# Altium PCB 2020-08-15_10-10-41.PcbDoc
Units mil, origin at the board's own origin, x right, y up, seen from the top; angles counter-clockwise.
Board outline 1600 x 2200 mil, 4 copper layers (Top Layer, MidLayer1, MidLayer2, Bottom Layer); 13 components, 6 nets, 27 pads, 47 vias.
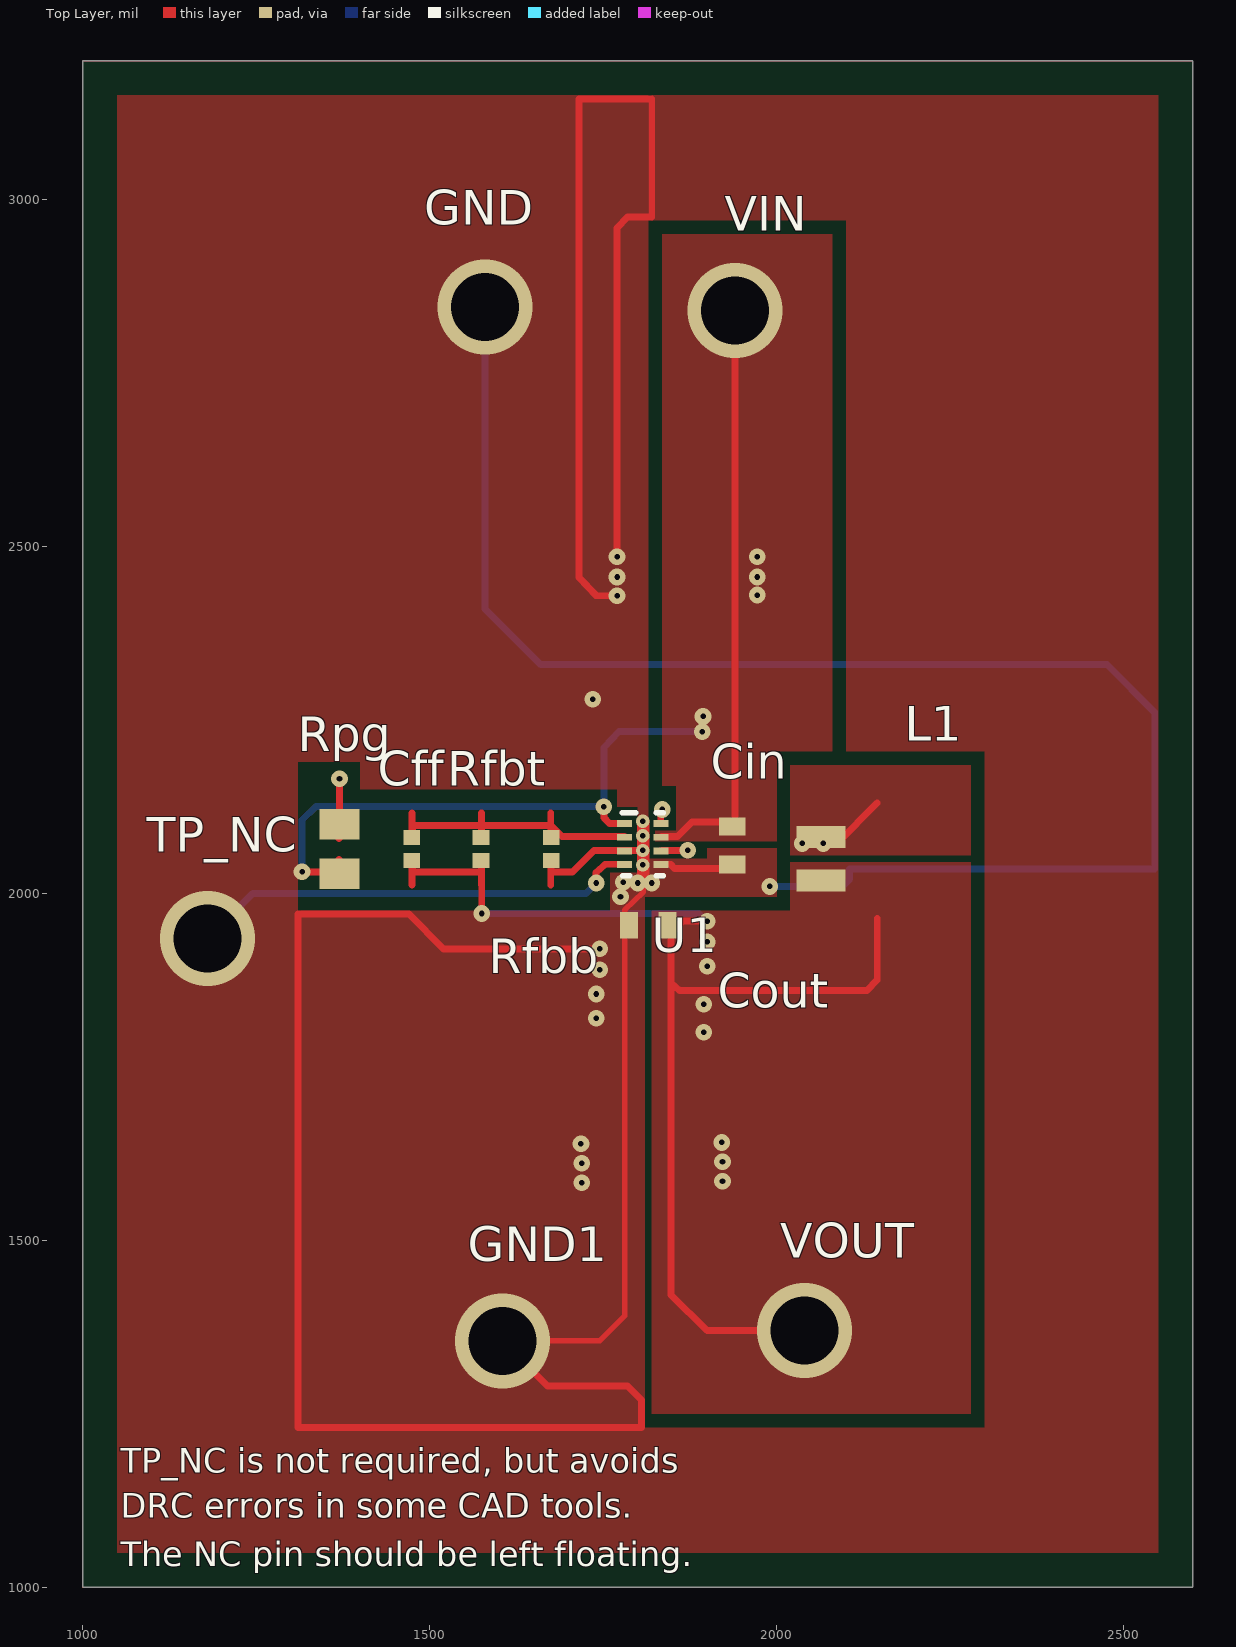
[diagram p0: Top Layer view]
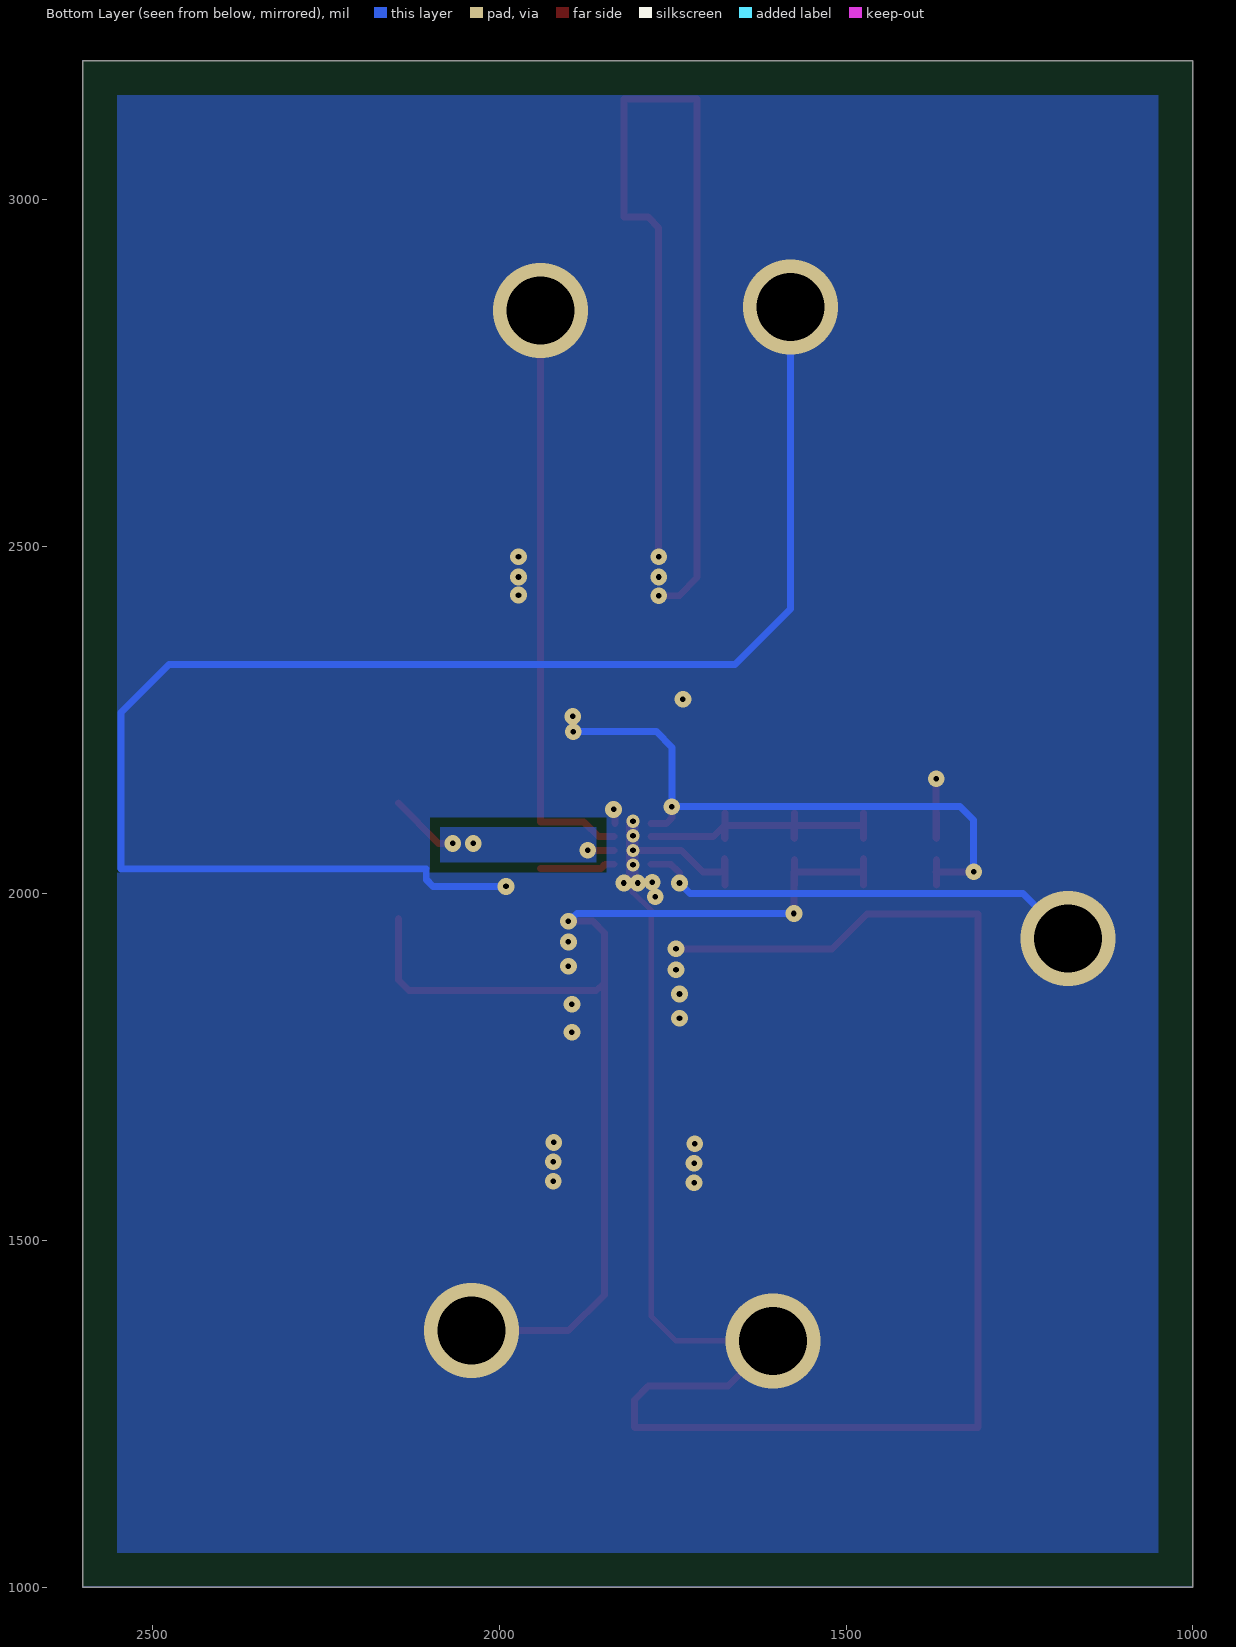
[diagram p1: Bottom Layer view, seen from below]
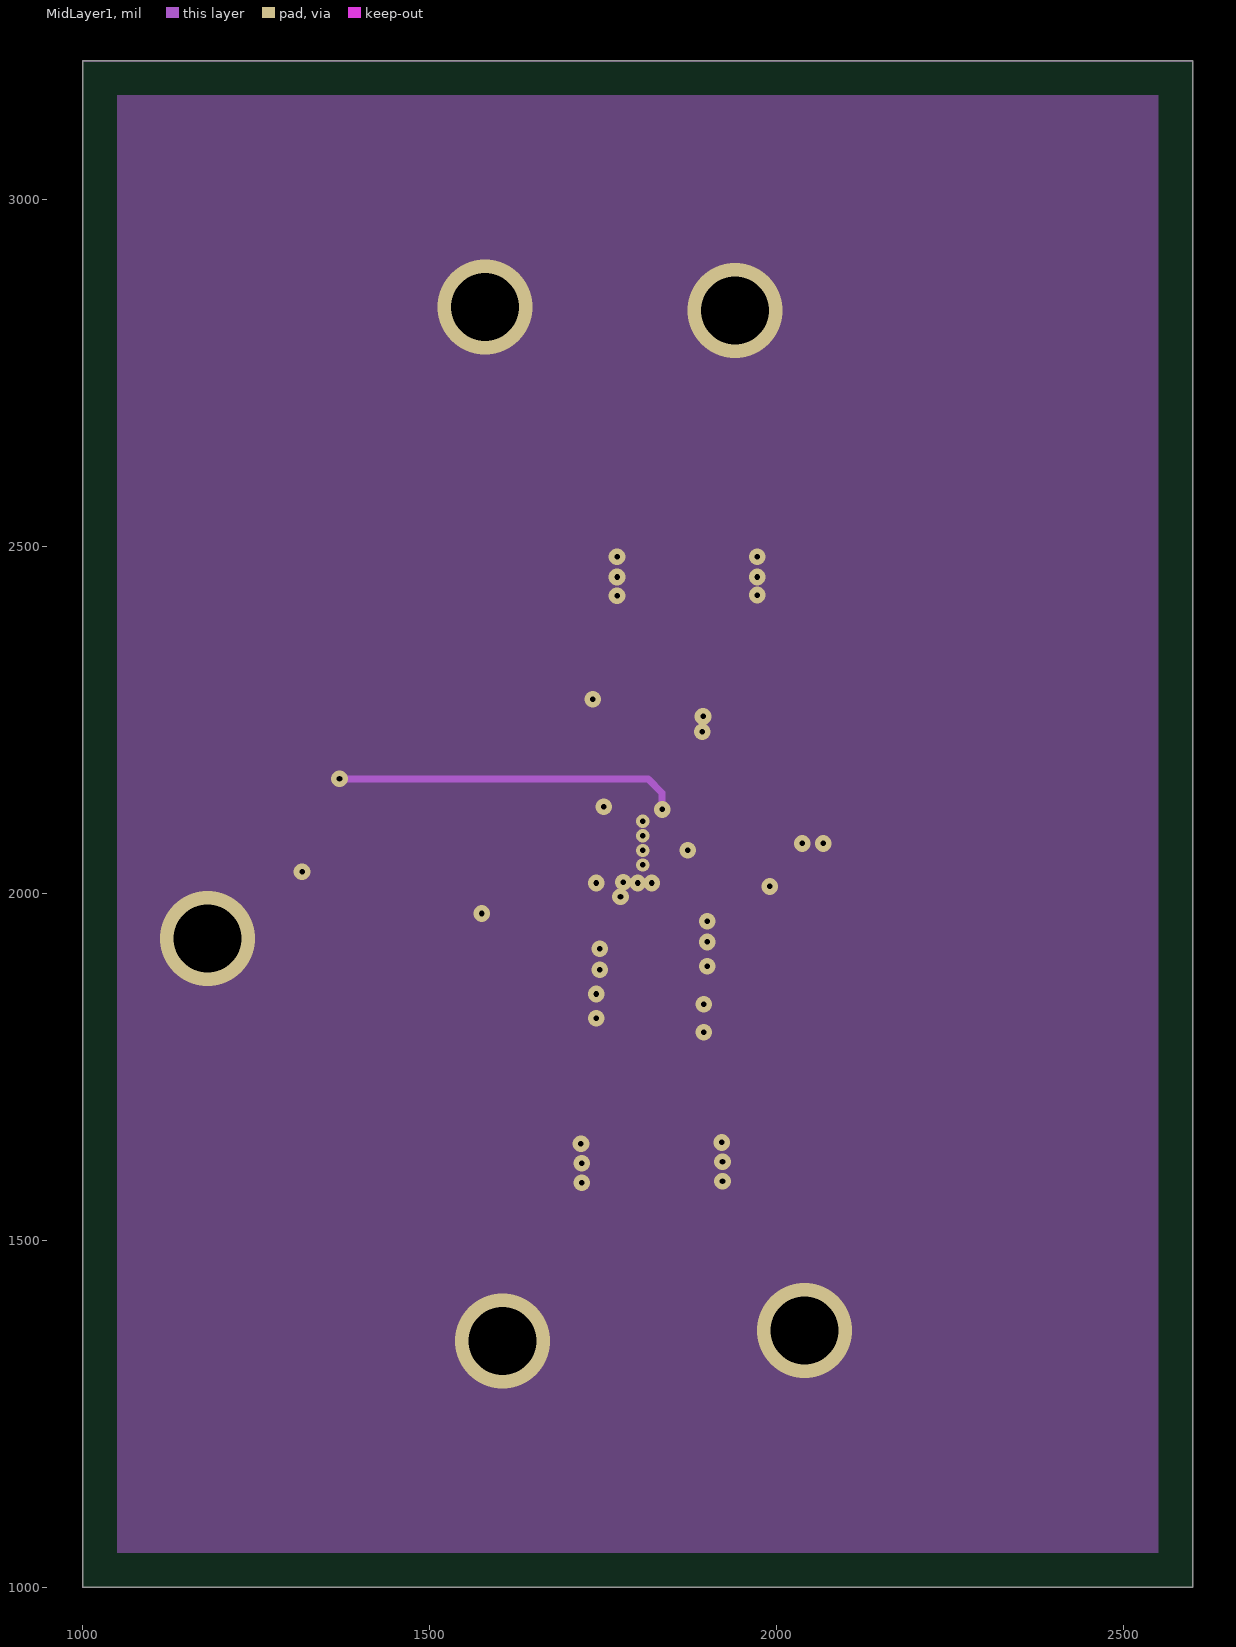
[diagram p2: MidLayer1]
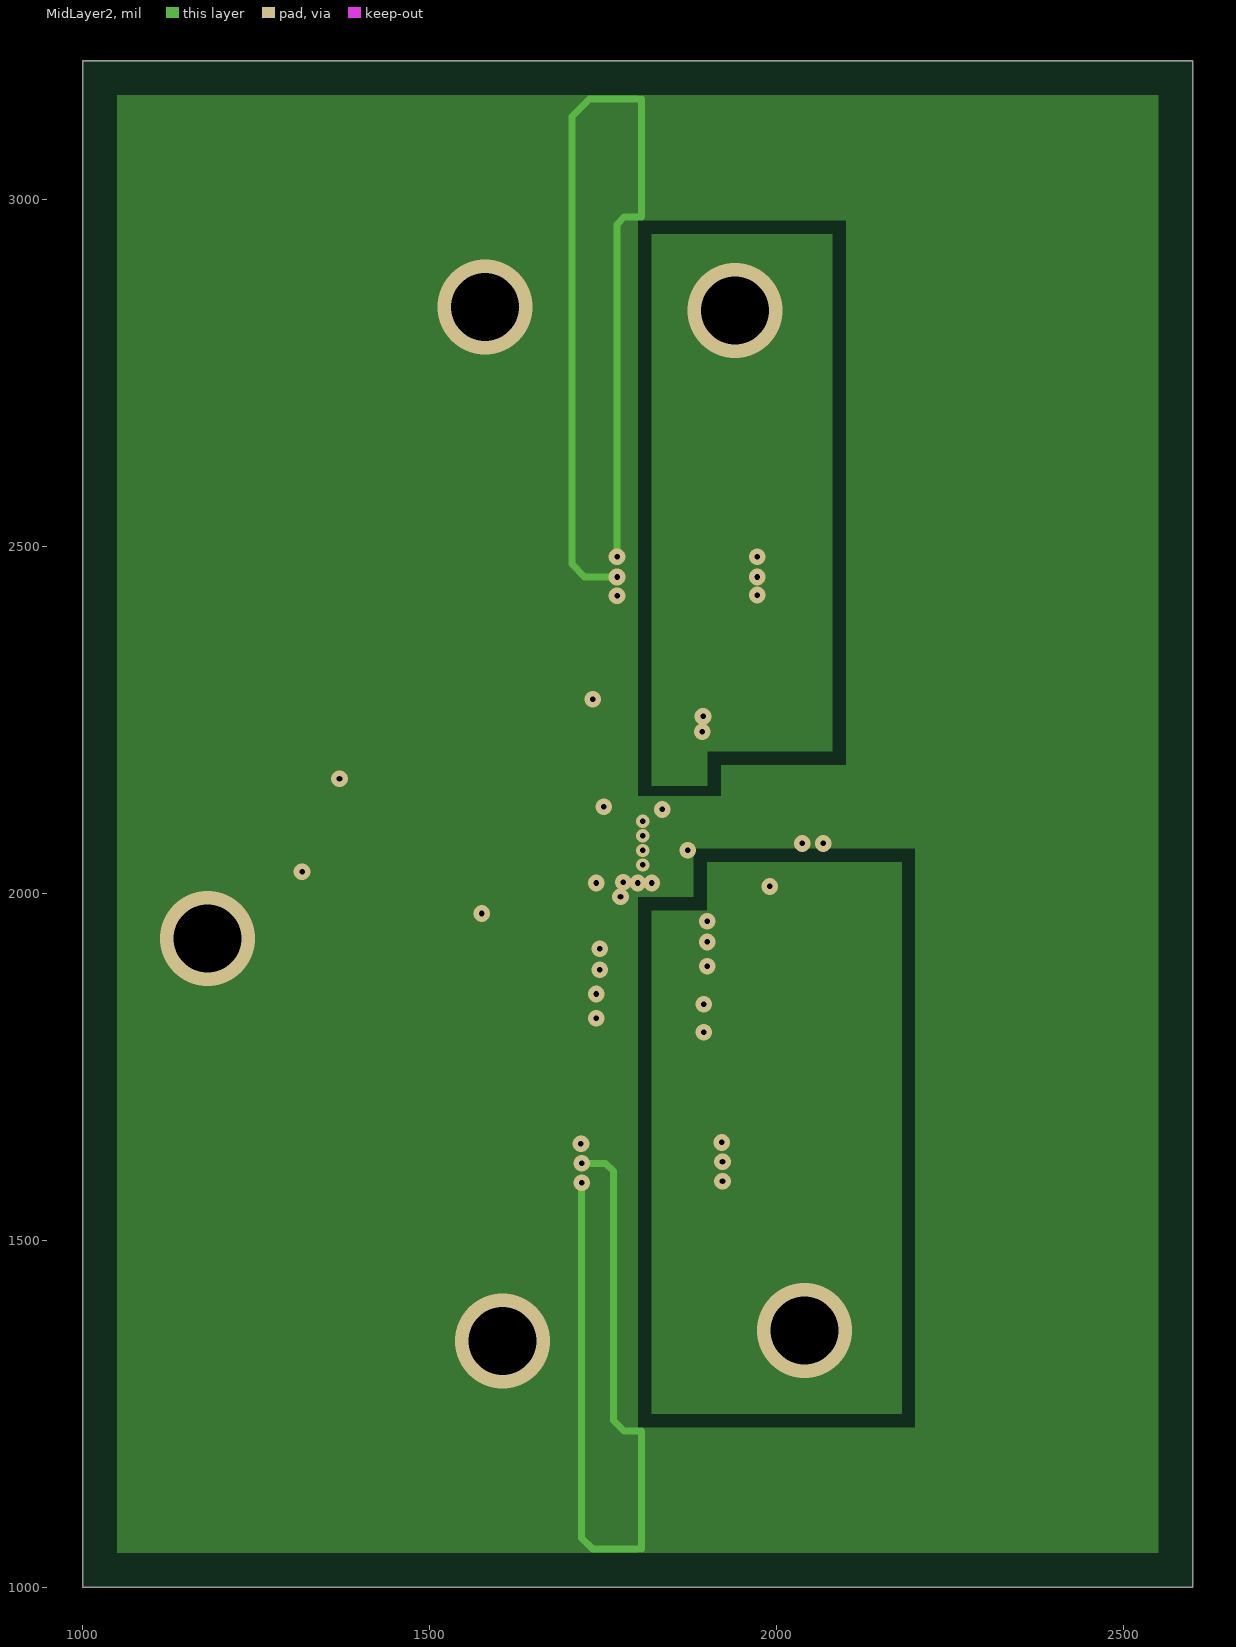
[diagram p3: MidLayer2]

## Layer stack, top to bottom
Top Solder: solder mask 0.4, Solder Resist, Dk 3.5
Top Layer: signal copper 1.4
Dielectric1: core 12.6, FR-4, Dk 4.8
MidLayer1: signal copper 1.4
Dielectric2: prepreg 12.6, FR-4, Dk 4.8
MidLayer2: signal copper 1.4
Dielectric3: core 12.6, FR-4, Dk 4.8
Bottom Layer: signal copper 1.4
Bottom Solder: solder mask 0.4, Solder Resist, Dk 3.5

## Board outline
1000,1000 2600,1000 2600,3200 1000,3200

## Design rules (kind name [scope] priority, off if disabled: settings)
Clearance [All] p1: gap=10
PlaneConnect [All] p1: planeconnectstyle=Direct reliefexpansion=20 reliefentries=4 reliefconductorwidth=10 reliefairgap=10
PolygonConnect [All] p1: connectstyle=Direct reliefconductorwidth=10 reliefentries=4 polygonreliefangle="90 Angle" airgapwidth=10
RoutingVias [All] p1: holewidth=28 width=50 viastyle="Through Hole" minholewidth=28 minwidth=50 maxholewidth=28 maxwidth=50
SolderMaskExpansion [All] p1: expansion=4
Width [All] p1: maxlimit=10 minlimit=10 preferedwidth=10
29 further rules are at their usual default settings.

## Components (designator, comment, footprint, x,y, rotation, side; value= is the part's Value field where it differs from the comment)
Cff "Comment" 0402 1474,2064 r90 top
Cin "Comment" 0603 1936,2069 r270 top
Cout "Comment" 0603 1815,1954 r180 top
GND "Comment" TP-1502 1578,2844 r270 top
GND1 "Comment" TP-1502 1603,1353 r270 top
L1 "Comment" DFE201610E 2064,2050 r270 top
Rfbb "Comment" 0402 1675,2064 r270 top
Rfbt "Comment" 0402 1574,2064 r90 top
Rpg "Comment" 0805 1370,2064 r270 top
TP_NC "Comment" TP-1502 1178,1935 r270 top
U1 "Comment" DLC0008A 1807,2071 r0 top
VIN "Comment" TP-1502 1939,2840 r270 top
VOUT "Comment" TP-1502 2038,1370 r270 top

## Footprints (in the part's own frame and the unit in brackets; to place one, negate y for a bottom-side part, rotate by r counter-clockwise, add the part's x,y. Pads: shape width x height; smd on the part's side, far side on the other; paste and mask are expansions set on the pad)
0402 [mil]
  rect 22x24 smd: 1(-16.5,0) 2(16.5,0)
0603 [mil]
  rect 26x38 smd: 1(-27.5,0) 2(27.5,0)
0805 [mil]
  rect 44x57 smd: 1(-35.5,0) 2(35.5,0)
DFE201610E [mm]
  rect 0.8x1.8 smd: 1(0.8,0) 2(-0.8,0)
DLC0008A [mm]
  rect 0.55x0.25 smd: 1(-0.675,0.75) 2(-0.675,0.25) 3(-0.675,-0.25) 4(-0.675,-0.75) 5(0.675,-0.75) 6(0.675,-0.25) 7(0.675,0.25) 8(0.675,0.75)
  silkscreen extent -0.75,-1.15 0.75,1.15
TP-1502 [mil]
  round 65 / inner round 0 / far side round 65 hole 32 unplated: 1(0,0)

## Via types
v1: diameter 24/24/24/24 (per signal layer), hole 8, Top Layer to Bottom Layer, 38 vias
v2: diameter 137/137/137/137 (per signal layer), hole 98, Top Layer to Bottom Layer, 5 vias
v3: diameter 19/19/19/19 (per signal layer), hole 8, Top Layer to Bottom Layer, 4 vias

## Nets (pads, with @x,y where several pads share a name; then routed paths per layer and width w, separated by ;. In a path a pad name is that pad's centre, name@x,y a point inside that pad or via, vN(x,y) a via of type N, cw(c..) or ccw(c..) an arc to the next point about the centre after c; other vN are vias at no path point)
0: Cin.2 Cout.2 GND1.1 GND.1 Rfbb.2 U1.3 U1.5 | length 9774.3
  Top Layer w8: v2(1605,1355) 1745,1355 1781,1391 1781,1930 1781,1976 1808,2002 v1@1808,2023
  Top Layer w10: v2(1605,1355) 1670,1290 1785,1290 1805,1270 1805,1230 1310,1230 1310,1970 1470,1970 1520,1920 v1(1745,1920) ; 1674.5,2012 Rfbb.2@1674.5,2049 ; Rfbb.2@1675,2050 1675,2031 1706,2031 1737,2062 1781,2062 v3(1807,2062) ; v1(1770,2429) 1740,2429 1715,2455 1715,3145 1820,3145 1820,2975 1785,2975 1770,2959 v1(1770,2485) ; U1.5@1834,2042 1847,2042 1853,2036 Cin.2@1940,2036
  Top Layer w15: v1(1800,2015) v1@1808,2023
  Top Layer w18: v1@1808,2023 v3@1808,2104
  MidLayer2 w10: v1(1719,1583) 1719,1071 1735,1055 1805,1055 1805,1225 1780,1225 1765,1240 1765,1600 1753,1611 v1(1719,1611) ; v1(1770,2456) 1723,2456 1705,2475 1705,3120 1730,3145 1805,3145 1805,2975 1780,2975 1770,2964 v1(1770,2485)
  Bottom Layer w10: v2(1580,2845) 1580,2410 1660,2330 2476,2330 2545,2261 2545,2035 2105,2035 2105,2020 2095,2010 v1(1990,2010)
  other v1: 1718,1639 1740,1820 1740,1855 1745,1890 1775,1995 1820,2015 1779,2016 1735,2280
  other v3: 1807,2041 1807,2083 1807,2104
1: Cff.2 Rfbb.1 Rfbt.2 U1.2 | length 477.6
  Top Layer w10: Cff.2@1474.5,2079 1474.5,2116 ; Cff.2@1475,2080 1475,2098 1575,2098 ; Rfbt.2@1574.5,2079 1574.5,2116 ; Rfbt.2@1575,2080 1575,2098 ; Rfbb.1@1674.5,2079 1674.5,2116 ; Rfbb.1@1675,2080 1675,2098 ; U1.2@1781,2082 1691,2082 1675,2098 ; 1575,2098 1675,2098
2: Cin.1 Rpg.2 U1.1 U1.7 VIN.1 | length 1746.4
  Top Layer w10: v1(1316,2031) Rpg.2@1370,2031 ; Rpg.2@1369.5,2012 Rpg.2@1369.5,2049 ; v1(1751,2125) 1751,2109 1759,2101 U1.1@1781,2101 ; U1.7@1834,2082 1857,2082 1878,2103 1940,2103 v2(1940,2840)
  Bottom Layer w10: v1(1316,2031) 1316,2106 1336,2125 v1(1751,2125) 1751,2210 1773,2233 v1(1893,2233)
  other v1: 1894,2255 1972,2430 1972,2456 1972,2485
3: Cff.1 Cout.1 L1.1 L1.2 Rfbt.1 U1.6 VOUT.1 | length 1912.7
  Top Layer w10: 1474.5,2012 Cff.1@1474.5,2049 ; Cff.1@1475,2050 1475,2031 1575,2031 v1(1575,1971) ; 1574.5,2012 Rfbt.1@1574.5,2049 ; U1.6@1834,2062 v1(1872,2062) ; v1(1900,1960) 1865,1960 1848,1943 1848,1930 1848,1871 ; v2(2040,1370) 1900,1370 1848,1421 1848,1871 ; v1(2067,2072) 2087,2072 2145,2130 ; 2145,1964 2145,1875 2130,1860 1860,1860 1848,1871
  Bottom Layer w10: v1(1575,1971) 1888,1971 v1(1900,1960)
  other v1: 1922,1585 1922,1613 1921,1641 1895,1800 1895,1840 1900,1895 1900,1930 2037,2072
4: TP_NC.1 U1.4 | length 653.8
  Top Layer w10: v1(1740,2015) 1740,2030 1753,2042 U1.4@1781,2042
  Bottom Layer w10: v2(1180,1935) 1245,2000 1725,2000 v1(1740,2015)
5: Rpg.1 U1.8 | length 641.3
  Top Layer w10: Rpg.1@1369.5,2079 Rpg.1@1369.5,2116 ; Rpg.1@1370,2080 1370,2098 v1(1370,2165) ; U1.8@1833,2101 1833,2121 v1(1835,2121)
  MidLayer1 w10: v1(1370,2165) 1815,2165 1835,2145 v1(1835,2121)

## Polygon pours and split planes (outlines as drawn)
0 on Top Layer "Top Layer-No Net" (solid, pour order 8): 1900,2050 1900,2065 2000,2065 2000,1995 1810,1995 1810,1235 1315,1235 1315,1975 1760,1975 1760,2030 1800,2030 1800,2125 1770,2125 1770,2150 1400,2150 1400,2190 1310,2190 1310,1230 2300,1230 2300,2205 2100,2205 2100,2970 1820,2970 1820,3150 2550,3150 2550,1050 1810,1050 1050,1050 1050,3150 1815,3150 1815,2050
2 on Top Layer "Top Layer-No Net" (solid, pour order 4): 2000,2205 2080,2205 2080,2950 1835,2950 1835,2155 1855,2155 1855,2090 1825,2090 1825,2075 2000,2075
3 on Top Layer "Top Layer-No Net" (solid, pour order 3): 2020,1975 1820,1975 1820,1250 2280,1250 2280,2045 2020,2045
3 on Top Layer "Top Layer-No Net" (solid, pour order 2): 2020,2055 2280,2055 2280,2185 2020,2185
0 on Bottom Layer "Top Layer-No Net" (solid, pour order 9): 2550,2030 2550,1050 1050,1050 1050,3150 2550,3150 2550,2035 2100,2035 2100,2110 1845,2110 1845,2030
3 on Bottom Layer "Top Layer-No Net" (solid, pour order 5): 1860,2045 1860,2095 2085,2095 2085,2045
0 on MidLayer2 "Top Layer-No Net" (solid, pour order 6): 2100,2970 1805,2970 1805,3150 2550,3150 2550,1050 1805,1050 1805,1230 2200,1230 2200,2065 1880,2065 1880,1995 1800,1995 1800,1050 1050,1050 1050,3150 1800,3150 1800,2140 1920,2140 1920,2185 2100,2185
2 on MidLayer2 "Top Layer-No Net" (solid, pour order 1): 1900,2155 1900,2205 2080,2205 2080,2950 1820,2950 1820,2155
3 on MidLayer2 "Top Layer-No Net" (solid, pour order 0): 1900,2045 2180,2045 2180,1250 1820,1250 1820,1975 1900,1975
0 on MidLayer1 "Top Layer-No Net" (solid, pour order 7): 2550,3150 2550,1050 1050,1050 1050,3150

## Other copper
Multi-Layer:
  the board outline again, w1

## Silkscreen, mask and mechanical layers (free items; w line width, h text height)
Top Overlay:
  text "TP_NC is not required, but avoids" at 1055,1165 h35
  text "DRC errors in some CAD tools." at 1055,1100 h35
  text "The NC pin should be left floating." at 1055,1030 h35